# Altium PCB Notification.PcbDoc
Units mm, origin at the board's own origin, x right, y up, seen from the top; angles counter-clockwise.
Board outline 30 x 31.5 mm, 2 copper layers (Top Layer, Bottom Layer); 13 components, 12 nets, 47 pads, 5 vias.
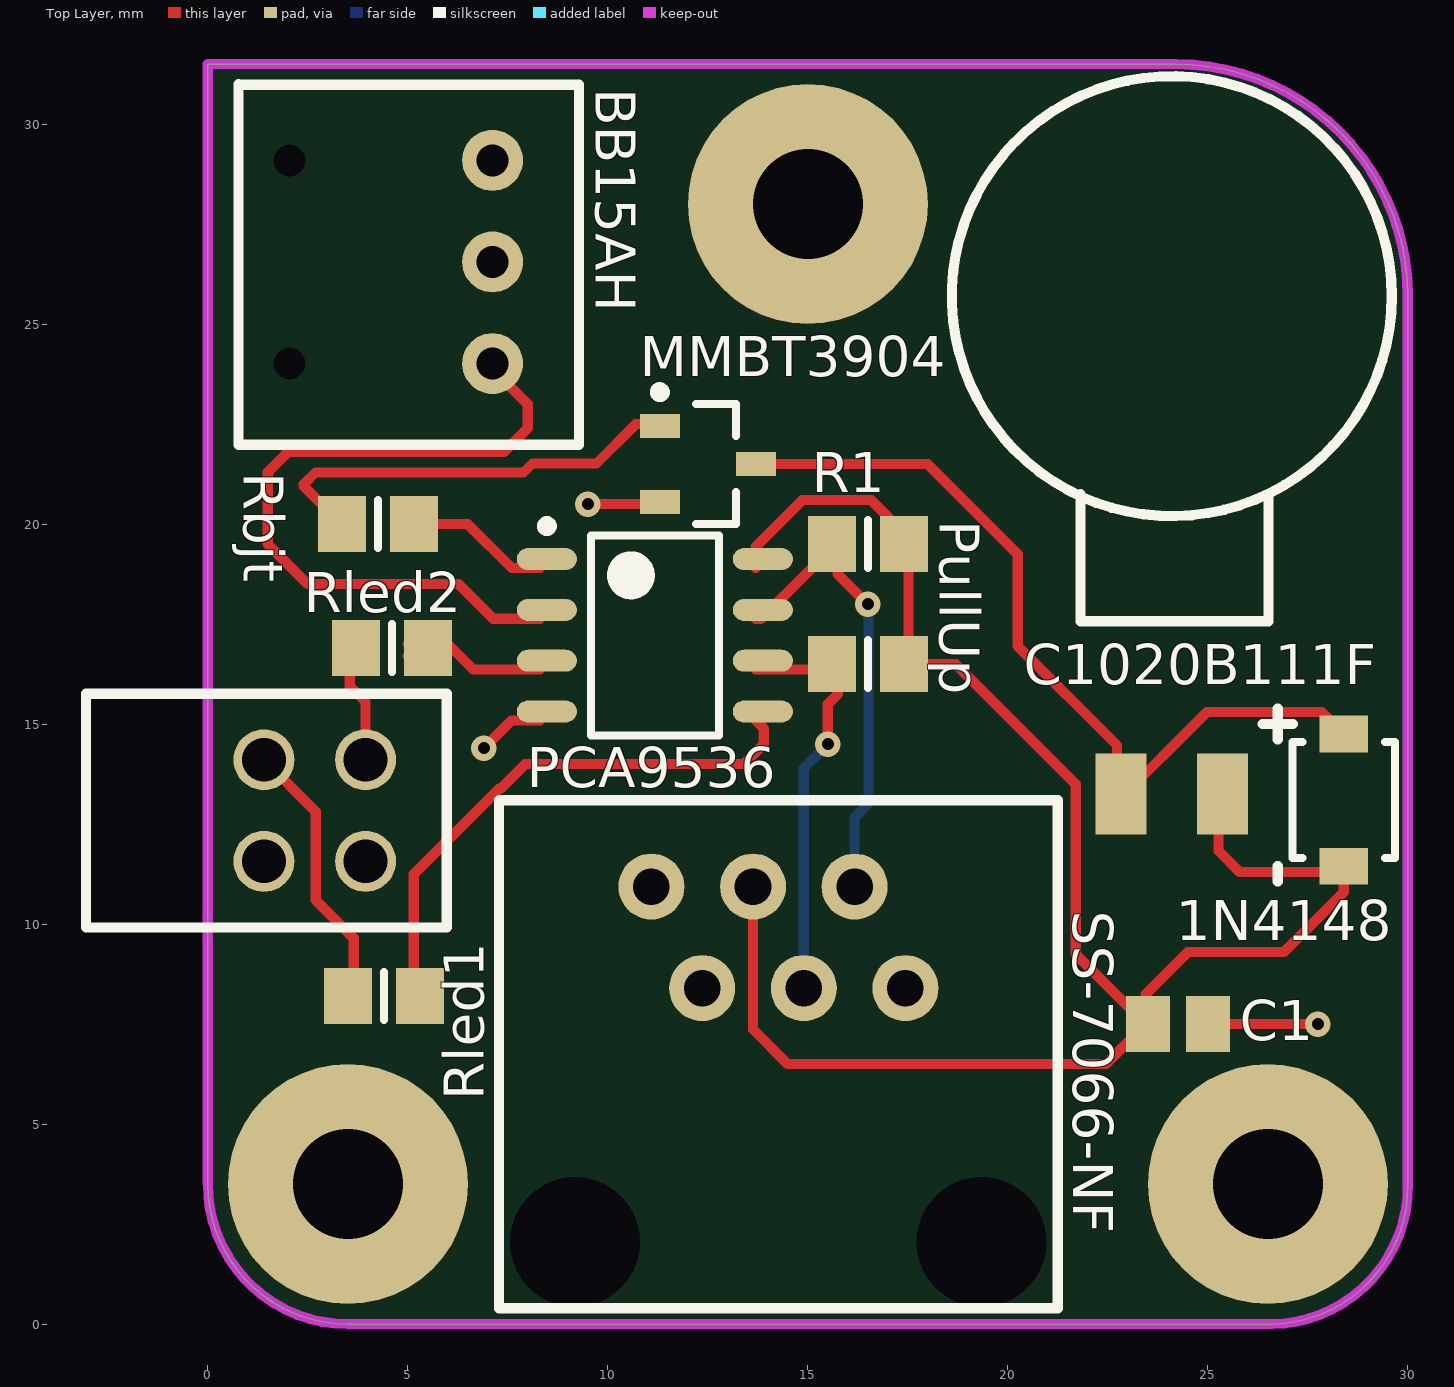
[diagram p0: Top Layer view]
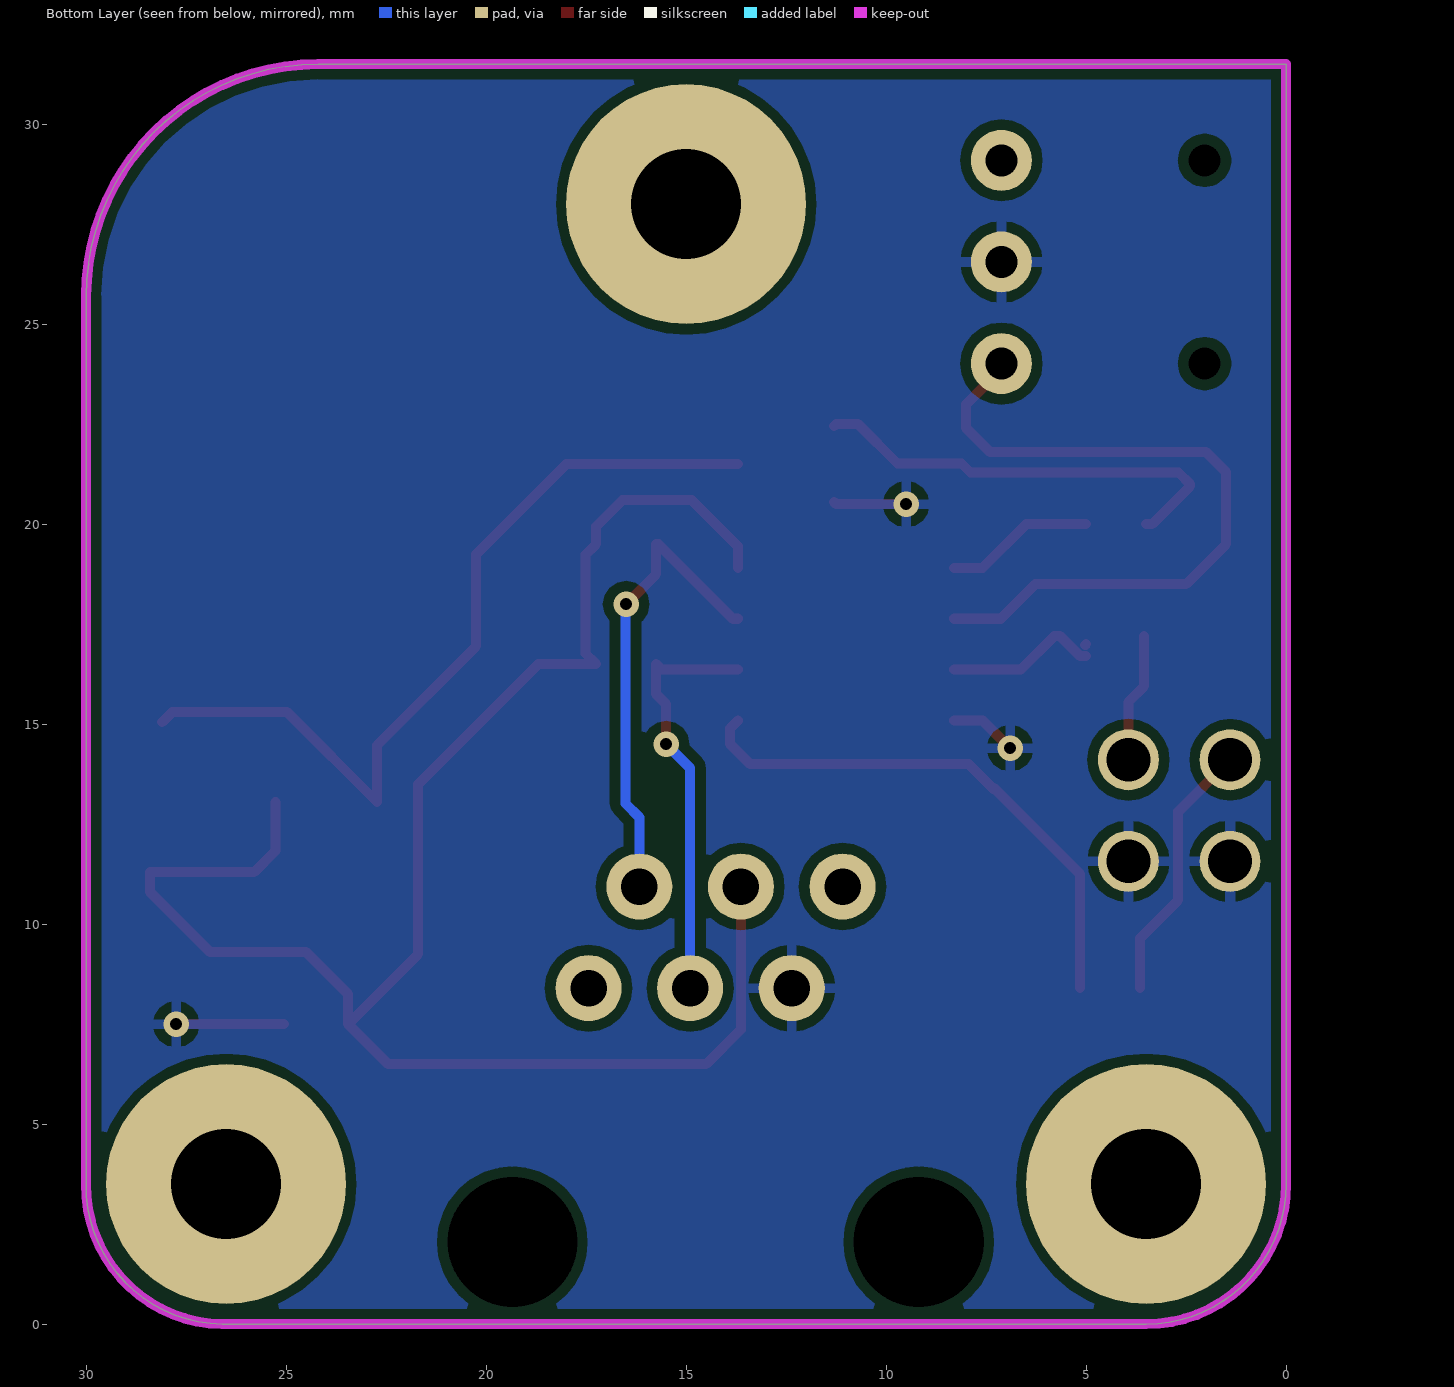
[diagram p1: Bottom Layer view, seen from below]

## Layer stack, top to bottom
Top Solder: solder mask 0.0102, Solder Resist, Dk 3.5
Top Layer: signal copper 0.0356
Dielectric 1: dielectric 0.32, FR-4, Dk 4.8
Bottom Layer: signal copper 0.0356
Bottom Solder: solder mask 0.0102, Solder Resist, Dk 3.5

## Board outline
0,3.5 ccw(c3.5,3.5) 3.5,0 26.6,0 ccw(c26.55,3.45) 30,3.5 30,25.7 ccw(c24.2,25.7) 24.2,31.5 0,31.5

## Design rules (kind name [scope] priority, off if disabled: settings)
Clearance [All] p1: gap=0.254 ignorepadtopadclearanceinfootprint=FALSE except(0: Arc-Hole Track-Hole SMDPad-Hole THPad-Hole Via-Hole Fill-Hole Poly-Hole Region-Hole Text-Hole)
HoleSize [All] p1: absolutevalues=TRUE maxlimit=3.5 minlimit=0.025 maxpercent=80.000 minpercent=20.000
MinimumSolderMaskSliver [All] p1: minsoldermaskwidth=0.1
PolygonConnect [All] p1: connectstyle=Relief reliefconductorwidth=0.254 reliefentries=4 polygonreliefangle="90 Angle" airgapwidth=0.254
RoutingVias [All] p1: holewidth=0.711 width=1.27 viastyle="Through Hole" minholewidth=0.711 minwidth=1.27 maxholewidth=0.711 maxwidth=1.27
SilkToSilkClearance [All] p1: silktosilkclearance=0.1
SilkToSolderMaskClearance [IsPad] p1: minsilkscreentomaskgap=0.1 clearancetoexposedcopper=TRUE
SolderMaskExpansion [All] p1: expansion=0.102
Width [All] p1: maxlimit=0.254 minlimit=0.254 preferedwidth=0.254
26 further rules are at their usual default settings.

## Components (designator, comment, footprint, x,y, rotation, side; value= is the part's Value field where it differs from the comment)
1N4148 "*" 1N4148W 28.4,13.1 r90 top (schematic designator 1N4148W-TP)
5532212100F "5532212100F" 5532212100F 1.403,14.109 r270 top
BB15AH "*" BB15AH-FA 2.038,29.095 r270 top (schematic designator BB15AH-FA)
C1 "Cap 0.1uF" C0805 24.25,7.5 r0 top value=0.1F
C1020B111F "*" C1020B111F 24.1,25.7 r0 top
MMBT3904 "*" MMBT3904LT3G 12.5,21.5 r0 top (schematic designator MMBT3904L)
PCA9536 "*" PCA9536 11.176,17.221 r0 top
PullUp "Res 10K" 6-0805_N 16.5,16.5 r180 top value=10K
R1 "Res 10K" 6-0805_N 16.5,19.5 r180 top value=10K
Rbjt "Res 390" 6-0805_N 4.25,20 r0 top value=390
Rled1 "Res 110" 6-0805_N 4.4,8.2 r0 top value=110K
Rled2 "Res 110" 6-0805_N 4.6,16.9 r0 top value=110K
SS-7066-NF "*" SS-7066-NF 9.185,2.05 r0 top

## Footprints (in the part's own frame and the unit in brackets; to place one, negate y for a bottom-side part, rotate by r counter-clockwise, add the part's x,y. Pads: shape width x height; smd on the part's side, far side on the other; paste and mask are expansions set on the pad)
1N4148W [mm] "Diode"
  rect 0.92x1.22 smd: 1(-1.651,0) 2(1.651,0)
  silkscreen extent -2.03,-1.28 2.29,2.03, body extent -1.85,-0.9 1.85,0.9, height 1.35
6-0805_N [mm] "Chip Resistor, Body 2.0x1.2mm, IPC Medium Density"
  rect 1.2x1.4 smd: 1(-0.9,0) 2(0.9,0)
  silkscreen extent 0,-0.6 0,0.6, body extent -1.07,-0.7 1.07,0.7, height 0.7
5532212100F [mil] "Double LED"
  round 60 hole 43: 1(100,0) 2(0,0) 3(100,100) 4(0,100)
  silkscreen extent -65,-175 165,180, body extent -35,-409 135,145, height 380
BB15AH-FA [mil]
  round 60 hole 31.5: 1(0,200) 2(100,200) 3(200,200)
  round 0 hole 31.5: 22(200,0) ""(0,0)
  silkscreen extent -75,-50 280,285, body extent -78,-589 268,217, height 303
C0805 [mm] "Chip Capacitor, Body 2.0x1.3mm, IPC High Density"
  rect 1.1x1.4 smd: 1(-0.75,0) 2(0.75,0)
  body extent -1.1,-0.72 1.1,0.72, height 1.4
C1020B111F [mil] "DC motor"
  rect 50x80 smd: 1(-50,-490) 2(50,-490)
  silkscreen extent -216,-320 217,216, body extent -213,-447 213,213, height 50
MMBT3904LT3G [mm] "NPN BJT transistor"
  rect 1x0.6 smd: 1(-1.2,0.95) 2(-1.2,-0.95) 3(1.2,0)
  silkscreen extent -1.32,-1.5 0.7,1.92, body extent -1.3,-1.52 1.3,1.52, height 1.11
PCA9536 [mm] "IO expander"
  oval 1.5x0.55 smd mask+0.05: 1(-2.7,1.905) 2(-2.7,0.635) 3(-2.7,-0.635) 4(-2.7,-1.905) 5(2.7,-1.905) 6(2.7,-0.635) 7(2.7,0.635) 8(2.7,1.905)
  silkscreen extent -2.82,-2.5 1.6,2.85, body extent -3,-2.45 3,2.45, height 1.75
SS-7066-NF [mil]
  round 65 hole 36: 1(75,350) 2(125,250) 3(175,350) 4(225,250) 5(275,350) 6(325,250)
  round 0 hole 128: ""(0,0) ""(400,0)
  silkscreen extent -75,-65 475,435, body extent -55,-309 465,399, height 466

## Part data
1N4148: library part 1N4148W-TP, "Diode", Supplier Part Number 1=1N4148WTPMSCT-ND, Supplier 1=Digi-Key
5532212100F: "Double LED RG", Supplier Part Number 1=350-3134-ND, Supplier 1=Digi-Key
BB15AH: library part BB15AH-FA, "Switch Push button ON SPDT", Supplier Part Number 1=360-3265-ND, Supplier 1=Digi-Key
C1: "Capacitor 0.1uF", Supplier Part Number 1=478-1395-1-ND, LatestRevisionDate=29-May-2009, LatestRevisionNote="IPC-7351 Footprint Added.", PackageDescription="Chip Capacitor", PackageReference=C1206, Published=8-Jun-2000, Publisher="Altium Limited", Supplier 1=Digi-Key
C1020B111F: library part C1020B111F, "small DC motor", Supplier Part Number 1=1670-1005-ND, Supplier 1=Digi-Key
MMBT3904: library part MMBT3904L, "BJT NPN transistor", Supplier Part Number 1=MMBT3904LT3GOSCT-ND, Supplier 1=Digi-Key
PCA9536: library part PCA9536, "IO Expander", Supplier Part Number 1=296-21765-1-ND, Supplier 1=Digi-Key
PullUp R1: "Resistor 10K", Supplier Part Number 1=311-10.0KCRCT-ND, LatestRevisionDate=29-May-2009, LatestRevisionNote="IPC-7351 Footprint Added.", PackageDescription="Chip Resistor", PackageReference=J1-0603, Published=8-Jun-2000, Publisher="Altium Limited", Supplier 1=Digi-Key
Rbjt: "Resistor 390", Supplier Part Number 1=311-390GRCT-ND, LatestRevisionDate=29-May-2009, LatestRevisionNote="IPC-7351 Footprint Added.", PackageDescription="Chip Resistor", PackageReference=J1-0603, Published=8-Jun-2000, Publisher="Altium Limited", Supplier 1=Digi-Key
Rled1 Rled2: "Resistor 110", Supplier Part Number 1=311-110CRCT-ND, LatestRevisionDate=29-May-2009, LatestRevisionNote="IPC-7351 Footprint Added.", PackageDescription="Chip Resistor", PackageReference=J1-0603, Published=8-Jun-2000, Publisher="Altium Limited", Supplier 1=Digi-Key
SS-7066-NF: library part SS-7066-NF, "RJ12 Connector", Supplier Part Number 1=380-1043-ND, Supplier 1=Digi-Key

## Free pads (board coordinates)
  round 6 hole 2.75: 1(3.5,3.5) 1(15,28) 1(26.5,3.5)

## Via types
v1: diameter 0.635, hole 0.3, Top Layer to Bottom Layer, 5 vias

## Nets (pads, with @x,y where several pads share a name; then routed paths per layer and width w, separated by ;. In a path a pad name is that pad's centre, name@x,y a point inside that pad or via, vN(x,y) a via of type N, cw(c..) or ccw(c..) an arc to the next point about the centre after c; other vN are vias at no path point)
GND: 5532212100F.1 5532212100F.3 BB15AH.2 C1.2 MMBT3904.2 PCA9536.4 SS-7066-NF.2 | length 6.2
  Top Layer w0.254: v1(6.9,14.4) 7.595,15.095 PCA9536.4@8.3,15.095 ; v1(9.5,20.5) 11.25,20.5 MMBT3904.2 ; C1.2@25.05,7.5 v1(27.75,7.5)
Net1N4148W-TP_2: 1N4148.2 C1020B111F.1 MMBT3904.3 | length 21.1
  Top Layer w0.254: MMBT3904.3 18,21.5 20.25,19.25 20.25,16.95 22.73,14.47 22.73,13.054 24.976,15.3 27.851,15.3 1N4148.2@28.1,15.051
Net5532212100F_2: 5532212100F.2 Rled1.1 | length 6.6
  Top Layer w0.254: 5532212100F.2 2.7,12.812 2.7,10.6 3.65,9.65 Rled1.1@3.65,8.4
Net5532212100F_4: 5532212100F.4 Rled2.1 | length 3.3
  Top Layer w0.254: Rled2.1@3.55,17.2 3.55,15.95 3.943,15.557 5532212100F.4
NetMMBT3904L_1: MMBT3904.1 Rbjt.1 | length 11.1
  Top Layer w0.254: Rbjt.1@3.5,20 Rbjt.1 2.4,20.95 2.4,21 2.692,21.292 7.892,21.292 8.116,21.516 9.716,21.516 10.7,22.5 11.25,22.5 MMBT3904.1
P0: PCA9536.1 Rbjt.2 | length 3.8
  Top Layer w0.254: Rbjt.2@5,20 Rbjt.2 6.5,20 7.595,18.905 PCA9536.1@8.3,18.905
P1: BB15AH.3 PCA9536.2 | length 18.3
  Top Layer w0.254: BB15AH.3 7.118,23.882 8,23 8,22.4 7.4,21.8 2,21.8 1.5,21.3 1.5,19.5 2.5,18.5 6.27,18.5 7.135,17.635 PCA9536.2@8.3,17.635
P2: PCA9536.3 Rled2.2 | length 3.9
  Top Layer w0.254: Rled2.2@5,16.7 5.15,16.7 5.65,17.2 5.8,17.2 6.635,16.365 PCA9536.3@8.3,16.365 ; Rled2.2@5,17 Rled2.2@5.021,16.979
P3: PCA9536.5 Rled1.2 | length 13.6
  Top Layer w0.254: Rled1.2@5.15,8.4 5.15,11.25 7.284,13.384 7.321,13.384 7.937,14 13.4,14 13.9,14.5 13.9,14.895 PCA9536.5@13.7,15.095
SCL: PCA9536.6 PullUp.2 SS-7066-NF.4 | length 10.6
  Top Layer w0.254: PCA9536.6@13.7,16.365 15.615,16.365 15.75,16.5 15.75,15.75 15.5,15.5 v1(15.5,14.5)
  Bottom Layer w0.254: SS-7066-NF.4 14.9,13.9 v1(15.5,14.5)
SDA: PCA9536.7 R1.2 SS-7066-NF.5 | length 11.8
  Top Layer w0.254: PCA9536.7@13.7,17.635 13.833,17.635 15.698,19.5 15.75,19.5 15.75,18.75 v1(16.5,18)
  Bottom Layer w0.254: SS-7066-NF.5 16.17,12.67 16.516,13.016 16.516,17.984 v1(16.5,18)
VCC: 1N4148.1 C1.1 C1020B111F.2 PCA9536.8 PullUp.1 R1.1 SS-7066-NF.3 | length 46.9
  Top Layer w0.254: SS-7066-NF.3 13.63,7.37 14.5,6.5 22.45,6.5 C1.1@23.45,7.5 ; PCA9536.8@13.7,18.905 13.7,19.177 13.7,19.439 14.861,20.6 16.59,20.6 17.25,19.94 17.25,19.5 17.516,19.234 17.516,16.766 17.25,16.5 PullUp.1 18.7,16.5 21.7,13.5 21.7,9.25 C1.1@23.45,7.5 ; C1020B111F.2@25.27,13.054 25.27,11.83 25.8,11.3 28.4,11.3 28.4,10.8 26.9,9.3 24.5,9.3 23.45,8.25 C1.1@23.45,7.5
pads on no net: BB15AH. BB15AH.1 BB15AH.22 SS-7066-NF. SS-7066-NF.1 SS-7066-NF.6

## Polygon pours and split planes (outlines as drawn)
GND on Bottom Layer "GND" (solid, pour order 2): 0,3.5 ccw(c3.5,3.5) 3.5,0 26.6,0 ccw(c26.55,3.45) 30,3.5 30,25.7 ccw(c24.2,25.7) 24.2,31.5 0,31.5

## Keep-outs
Keep-Out Layer:
  the board outline again, w0.254